# EAGLE board RamenTimer (EAGLE 5.10)
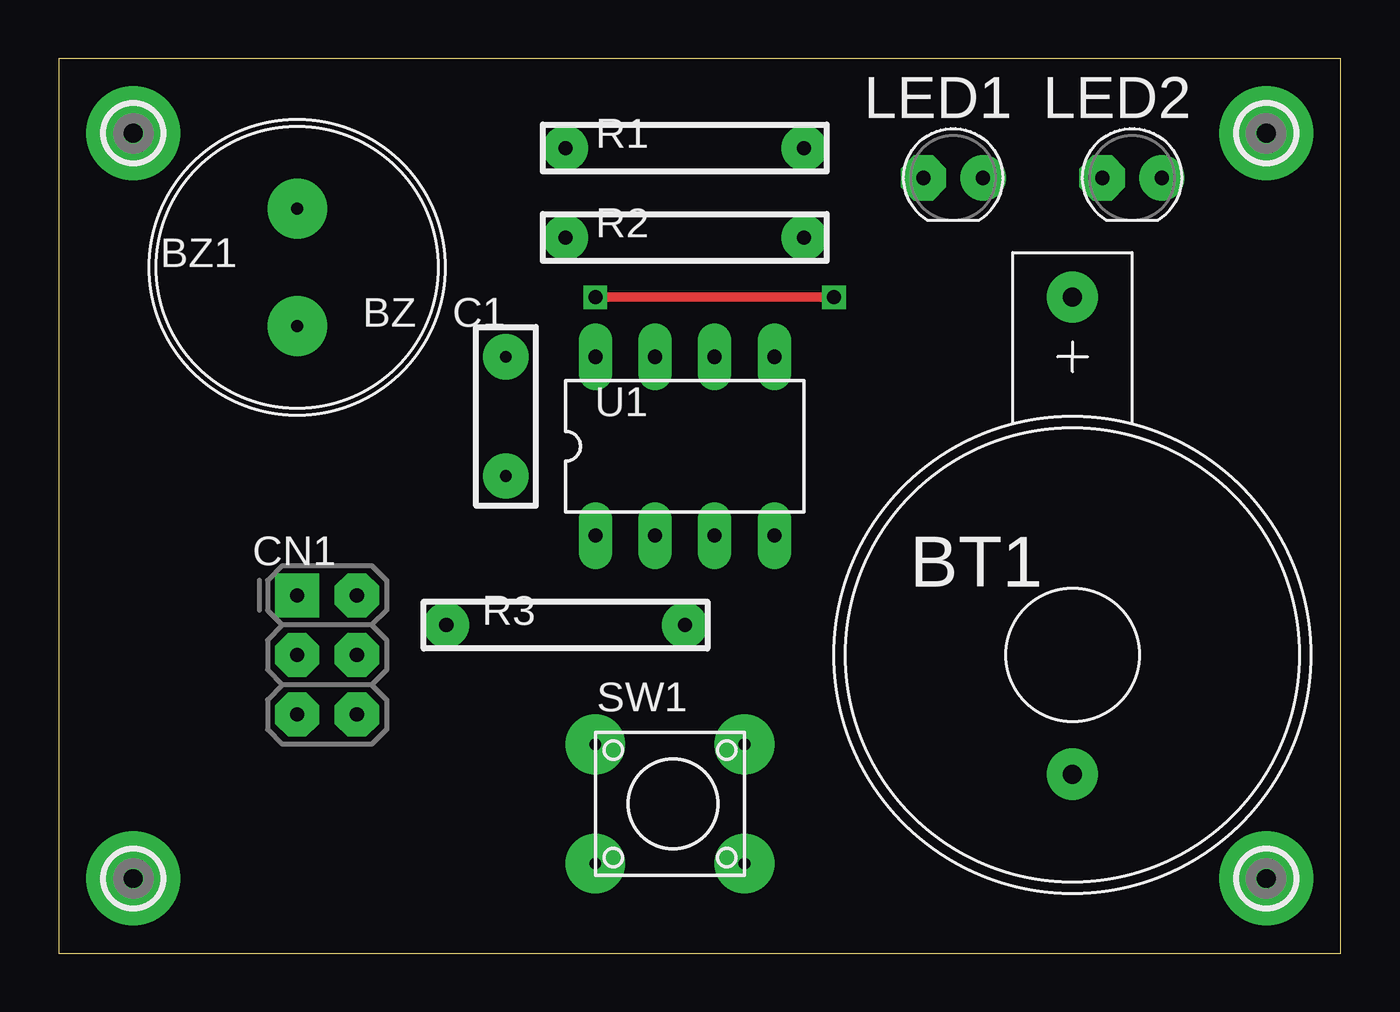
[diagram p0: board, top side]
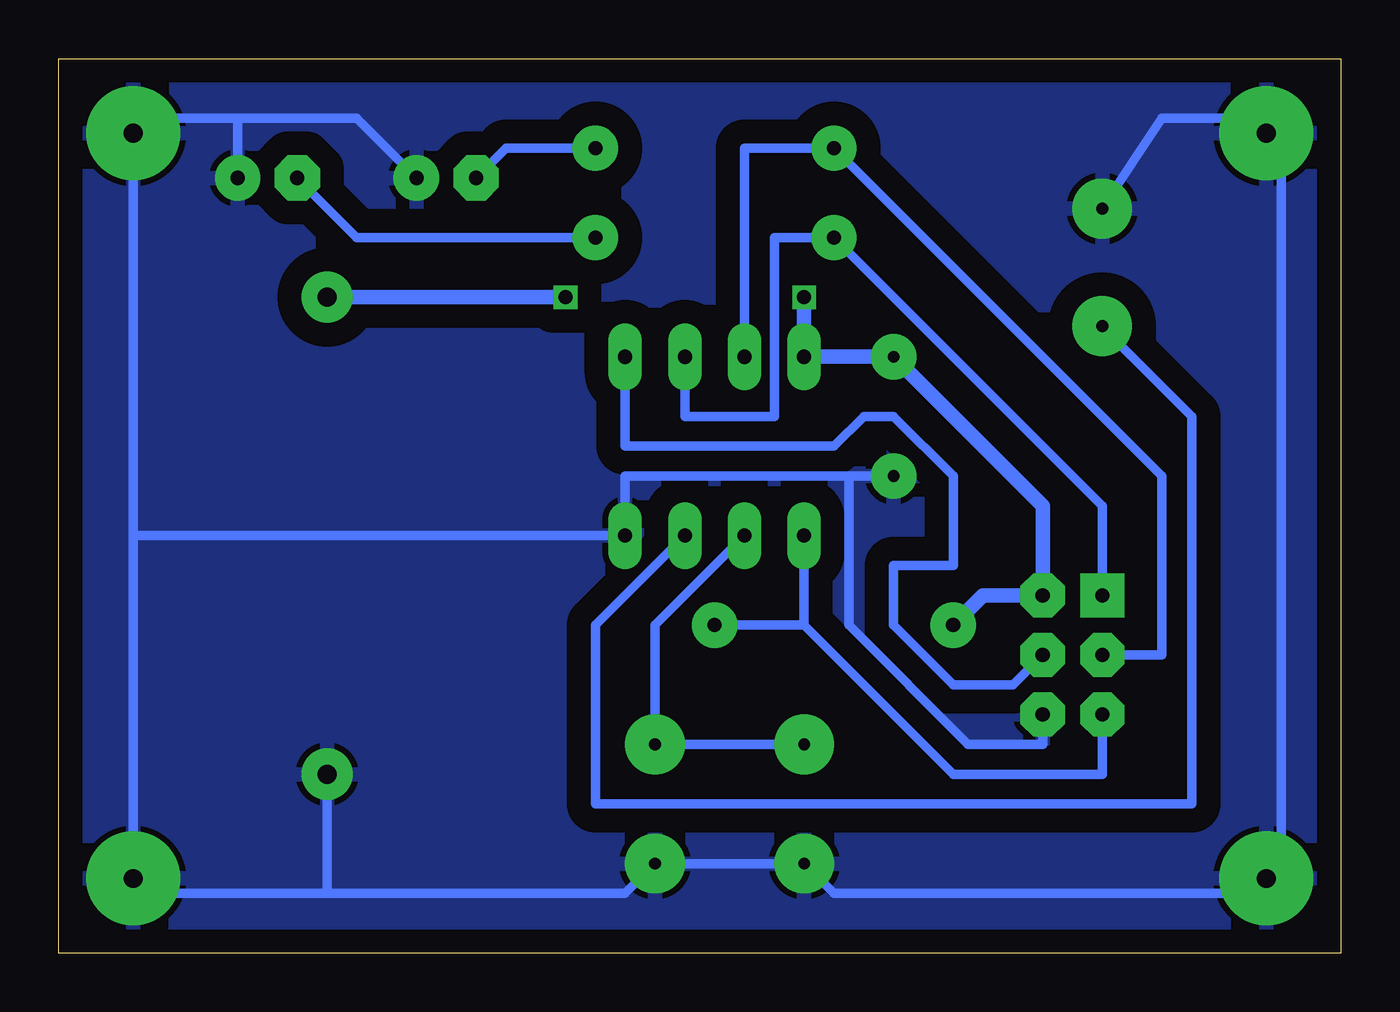
[diagram p1: board, bottom side, seen from below]

Size 54.61 x 38.1 mm. Coordinates in mm from the lower left corner, seen from the top.
Outline: 0,0 54.61,0 54.61,38.1 0,38.1 0,0
Copper layers (1*16): Top 0.035mm / dielectric 1.5mm / Bottom 0.035mm
Design rules "default": minimum track width 10mil, minimum drill 24mil, track to track 8mil, track to pad 8mil, pad to pad 8mil, via to via 8mil, smd to smd 8mil, copper to edge 40mil, drill to drill 8mil, minimum pad ring 10mil, minimum via ring 8mil, stop-mask expansion 4mil, vias tented up to drill 0mil, thermal gap 10mil

## Footprints (pad centres in the part's own frame; a part is rotated, then mirrored left to right if it is on the bottom)
CH25-2032 = drill 0.813 pad 2.184 round: P$1 15.24,0; P$2 -5.08,0
XXXX = drill 0.5 pad 2.54 round: P$1 -2.5,0; P$2 2.5,0
CAP_DIP_2 = drill 0.5 pad 1.93 round: 1 -2.54,0; 2 2.54,0
2X3-NS = drill 0.6 pad 1.88 square: 1 -2.54,-1.27 | drill 0.6 pad 1.88 octagon: 2 -2.54,1.27; 3 0,-1.27; 4 0,1.27; 5 2.54,-1.27; 6 2.54,1.27
LED_3MM_VIRT_2 = drill 0.6 pad 1.93 octagon: A -1.27,0 | drill 0.6 pad 1.93 round: K 1.27,0
PAD-2.1 = drill 0.8 pad 4 round: B2,1 0,0
R_0.125W_4 = drill 0.6 pad 1.93 round: 1 -5.08,0; 2 5.08,0
B3F-10X = drill 0.5 pad 2.54 round: 1 -1.27,2.54; 2 5.08,2.54; 3 -1.27,-2.54; 4 5.08,-2.54
DIL08 = drill 0.6 pad 1.422 long: 1 -3.81,-3.81; 2 -1.27,-3.81; 3 1.27,-3.81; 4 3.81,-3.81; 5 3.81,3.81; 6 1.27,3.81; 7 -1.27,3.81; 8 -3.81,3.81

## Placement (x,y rotation side)
BT1  3V  [CH25-2032]  43.18,12.7 90 top
BZ1  BZ  [XXXX]  10.16,29.21 90 top
C1  0.1u  [CAP_DIP_2]  19.05,22.86 90 top
CN1  AVR-ISP  [2X3-NS]  11.43,12.7 270 top
LED1  GREEN  [LED_3MM_VIRT_2]  38.1,33.02 0 top
LED2  RED  [LED_3MM_VIRT_2]  45.72,33.02 0 top
MT1  MOUNT-PAD2.1  [PAD-2.1]  51.44,3.17 0 top
MT2  MOUNT-PAD2.1  [PAD-2.1]  51.44,34.92 0 top
MT3  MOUNT-PAD2.1  [PAD-2.1]  3.17,34.92 0 top
MT4  MOUNT-PAD2.1  [PAD-2.1]  3.17,3.17 0 top
R1  330  [R_0.125W_4]  26.67,34.29 0 top
R2  330  [R_0.125W_4]  26.67,30.48 0 top
R3  10K  [R_0.125W_4]  21.59,13.97 180 top
SW1  TACT-SW  [B3F-10X]  27.94,6.35 180 top
U1  ATTINY13  [DIL08]  26.67,21.59 0 top

## Library data of the parts
BT1 = battery
BZ1 = buzzer
C1 LED1 LED2 MT1-MT4 R1-R3 SW1 = MyLib
CN1 U1 = atmel

## Nets
GND: BT1.P$2 BZ1.P$2 C1.1 CN1.6 LED1.K LED2.K MT1.B2,1 MT2.B2,1 MT3.B2,1 MT4.B2,1 SW1.1 SW1.2 U1.4
N$1: CN1.5 R3.1 U1.1
N$2: LED1.A R1.2
N$3: CN1.1 R2.1 U1.6
N$4: CN1.4 U1.5
N$5: CN1.3 R1.1 U1.7
N$6: LED2.A R2.2
N$7: SW1.3 SW1.4 U1.2
N$8: BZ1.P$1 U1.3
VCC: BT1.P$1 C1.2 CN1.2 R3.2 U1.8

## Tracks (layer width: path | path; a pad name or v marks a point on that pad's centre or on a via)
GND
  Bottom 0.254: 10.16,31.75 BZ1.P$2
  Bottom 0.406: 20.95,20.32 C1.1 | 20.95,20.32 30.48,20.32 U1.4 51.44,17.78 | CN1.6 12.7,8.89 15.88,8.89 20.95,13.97 20.95,20.32 | LED1.K 41.91,35.56 46.99,35.56 | 46.99,35.56 50.8,35.56 MT2.B2,1 51.44,17.78 | 10.16,31.75 7.62,35.56 2.54,35.56 | 2.54,35.56 2.54,2.54 MT4.B2,1 3.17,2.54 21.59,2.54 SW1.2 SW1.1 30.48,2.54 43.18,2.54 | 2.54,35.56 MT3.B2,1 | 51.44,17.78 MT1.B2,1 50.8,2.54 43.18,2.54 | 46.99,35.56 LED2.K | 43.18,2.54 BT1.P$2
  pour Bottom (isolate 1.016): 0,38.1 0,0 54.61,0 54.61,38.1
N$1
  Bottom 0.406: 22.86,13.97 R3.1 | 22.86,13.97 U1.1 | CN1.5 10.16,7.62 16.51,7.62 22.86,13.97
N$2
  Bottom 0.406: R1.2 35.56,34.29 LED1.A
N$3
  Bottom 0.406: U1.6 27.94,22.86 24.13,22.86 24.13,30.48 R2.1 10.16,19.05 CN1.1
N$4
  Bottom 0.406: U1.5 30.48,21.59 21.59,21.59 20.32,22.86 19.05,22.86 16.51,20.32 16.51,16.51 19.05,16.51 19.05,13.97 16.51,11.43 13.97,11.43 CN1.4
N$5
  Bottom 0.406: U1.7 25.4,34.29 R1.1 7.62,20.32 7.62,12.7 CN1.3
N$6
  Bottom 0.406: R2.2 41.91,30.48 LED2.A
N$7
  Bottom 0.406: U1.2 29.21,13.97 SW1.3 SW1.4
N$8
  Bottom 0.254: 10.16,26.67 BZ1.P$1
  Bottom 0.406: U1.3 31.75,13.97 31.75,6.35 6.35,6.35 6.35,22.86 10.16,26.67
VCC  (via drill 0.6)
  Top 0.406: v22.86,27.94 v33.02,27.94
  Bottom 0.61: R3.2 15.24,15.24 CN1.2 12.7,19.05 C1.2 U1.8 v22.86,27.94 | v33.02,27.94 BT1.P$1